# Altium PCB CAN-to-CAN.PcbDoc (part 1 of 2)
Units mil, origin at the board's own origin, x right, y up, seen from the top; angles counter-clockwise.
Board outline 5998 x 3656 mil, 2 copper layers (Top Layer, Bottom Layer); 112 components, 87 nets, 365 pads, 152 vias.
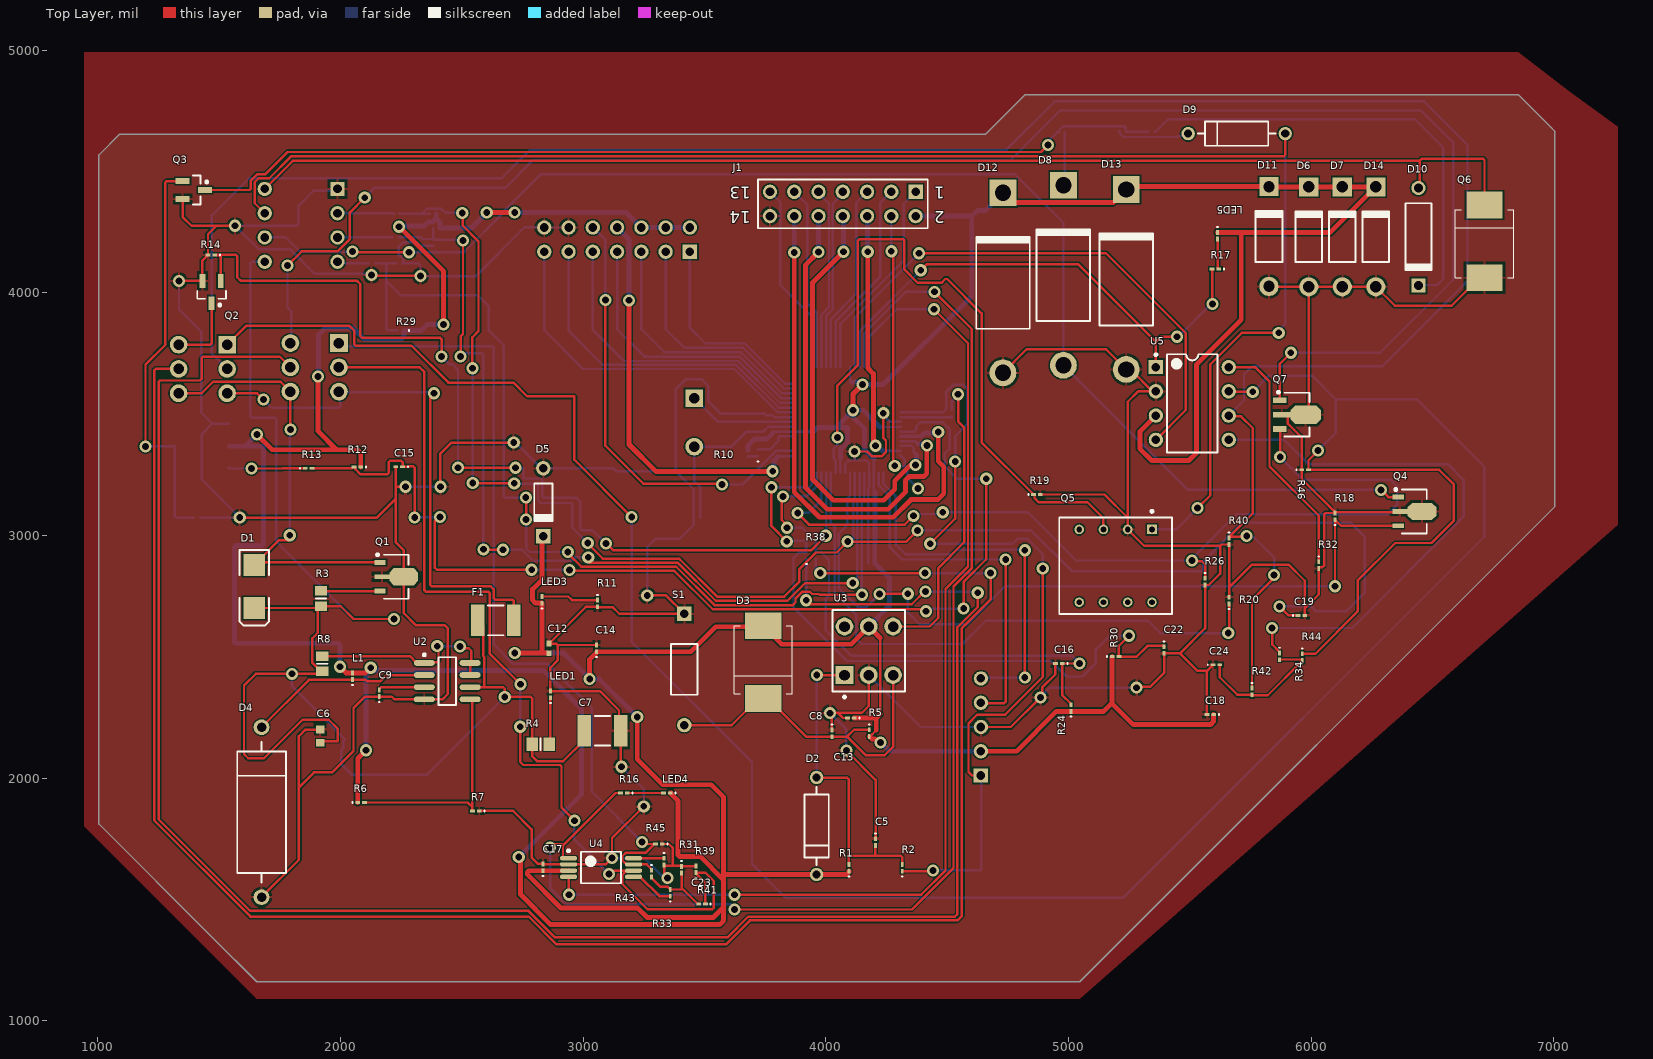
[diagram p0: Top Layer view]
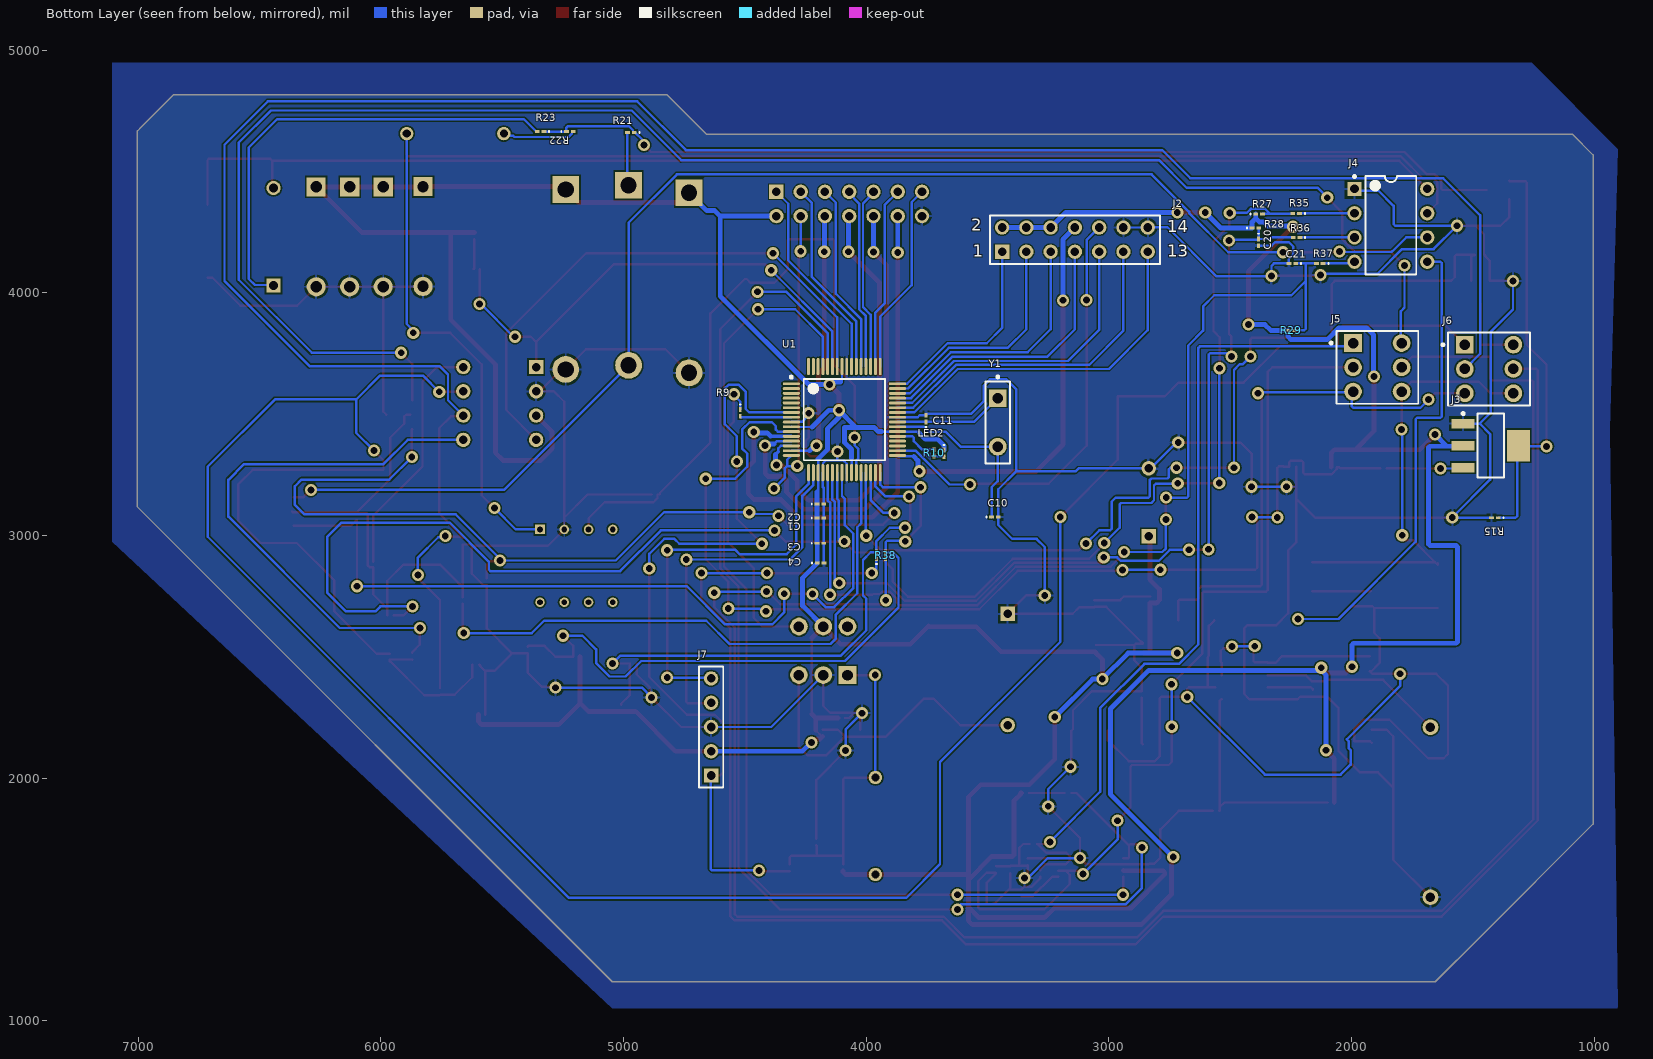
[diagram p1: Bottom Layer view, seen from below]

## Layer stack, top to bottom
Top Solder: solder mask 0.4, Solder Resist, Dk 3.5
Top Layer: signal copper 1.4
Dielectric 1: dielectric 12.6, FR-4, Dk 4.8
Bottom Layer: signal copper 1.4
Bottom Solder: solder mask 0.4, Solder Resist, Dk 3.5

## Board outline
1473,1343 1005,1811 1005,4568 1090,4653 4658,4653 4822,4817 6853,4817 6931,4739 6949,4721 6985,4685 7003,4667 7003,3118 5046,1161 1655,1161

## Design rules (kind name [scope] priority, off if disabled: settings)
Clearance [All] p1: gap=6 ignorepadtopadclearanceinfootprint=FALSE
PolygonConnect [All] p1: connectstyle=Relief reliefconductorwidth=10 reliefentries=4 polygonreliefangle="90 Angle" airgapwidth=10
RoutingVias [All] p1: holewidth=28 width=50 viastyle="Through Hole" minholewidth=28 minwidth=50 maxholewidth=28 maxwidth=50
SolderMaskExpansion [All] p1: expansion=4
Width [All] p1: maxlimit=20 minlimit=5 preferedwidth=10
30 further rules are at their usual default settings.

## Components (designator, comment, footprint, x,y, rotation, side; value= is the part's Value field where it differs from the comment)
C1 "100n" 0603#1 4189,3072 r180 bottom
C2 "100n" 0603#1 4189,3130 r180 bottom
C3 "100n" 0603#1 4189,2968 r180 bottom
C4 "100n" 0603#1 4188,2886 r180 bottom
C5 "100n" 0603#1 4205,1737 r270 top
C6 "10u/16" 1608[0603] 1917,2173 r90 top value=470u/16
C7 "100n" 1812 3080,2195 r0 top
C8 "10n" 0603#1 4025,2185 r270 top value=100pF
C9 "100p" 0603#1 2160,2350 r90 top value=100pF
C10 "27p" 0603#1 3469.38,3076 r180 bottom value=100n
C11 "27p" 0603#1 3753,3482 r90 bottom value=100n
C12 "100u/6V3" 0402 2860,2535 r90 top value=470u/16
C13 "100n" 0603#1 4103,2248 r180 top
C14 "100n" 0603#1 3055,2535 r90 top
C15 "100n" 0603#1 2242.22,3283 r180 top
C16 "100n" 0603#1 4960,2472 r180 top
C17 "100n" 0603#1 2835,1632.22 r90 top
C18 "100n" 0603#1 5584.22,2262 r180 top
C19 "100n" 0603#1 5959.78,2671 r0 top
C20 "100n" 0603#1 2383,4208 r270 bottom
C21 "100n" 0603#1 2244,4121 r0 bottom
C22 "100n" 0603#1 5394,2528.22 r270 top
C23 "4n7" 0603#1 3406,1622.78 r270 top value=100n
C24 "4n7" 0603#1 5609.22,2467.22 r0 top value=100n
D1 "P6SMB15A" SMB 1645,2790 r270 top
D2 "LL4148" DIODE-0.4 3962,1803 r270 top
D3 "LL4448" DIODE_SMC 3742,2478 r90 top
D4 "LL5817" DIODE-0.7 1675,1860 r90 top
D5 "BAT54S" DO-35 2836,3137 r270 top
D6 "BAT54S" DO-41 5989.95,4230.72 r90 top
D7 "BAT54S" DO-204AL 6128.06,4230.72 r90 top
D8 "LL4148" DO-201AD 4979,4072 r90 top
D9 "LL4148" DIODE-0.4 5693,4656 r180 top
D10 "LL4148" DO-7 6442,4231 r270 top
D11 "BAT54S" DO-41 5826,4232 r90 top
D12 "BAT54S" DO-201AD 4730,4041 r90 top
D13 "BAT54S" DO-201AD 5238,4055 r90 top
D14 "BAT54S" DO-41 6266.17,4230.72 r90 top
F1 "Fuse 1" 1812 2640,2650 r180 top
J1 "Header 7X2" HDR2X7 4370,4416 r180 top
J2 "Header 7X2" HDR2X7 3440,4169 r180 bottom
J3 "MX-43045-0400" SOT223_N 1426.42,3370.52 r180 bottom
J4 "MX-43045-0800" DIP-8 1838,4278 r180 bottom
J5 "MX-43045-0600" DPDT-6 1894,3693 r180 bottom
J6 "MX-43045-0600" DPDT-6 1433.44,3686.19 r180 bottom
J7 "ZL201" HDR1X5 4639,2011 r90 bottom
L1 "DL22-330" 0603#1 2050,2420 r90 top value=100uH
LED1 "HCL-1904AYL" 0603#1 2865,2345 r90 top
LED2 "HCL-1906BR1" 0603#1 3679,3338 r270 bottom
LED3 "HCL-1903BG4" 0603#1 2830,2735 r90 top
LED4 "HCL-1904AYL" 0603#1 3345,1939 r180 top
LED5 "HCL-1906BR1" 0603#1 5614,4235 r270 top
Q1 "BSS138" SOT89L 2230,2830 r0 top
Q2 "BSS123" SOT23_M 1469,4003 r270 top
Q3 "BSS123" SOT23_M 1396.26,4423.6 r0 top
Q4 "BSS123" SOT89L 6424.93,3099.06 r0 top
Q5 "BSS123" DIP-P8 5194,2875 r180 top
Q6 "BSS123" DIODE_SMC 6714,4212 r270 top
Q7 "BSS123" SOT89N 5941.6,3497.67 r0 top
R1 "4k7" 0603#1 4095,1630.78 r90 top value=1K
R2 "4k7" 0603#1 4315,1630.78 r90 top value=1K
R3 "1M" 6-0805_L 1920,2740 r90 top value=1K
R4 "4k7" 6-0805_N 2825,2140 r0 top value=1K
R5 "10k" 0603#1 4179,2186 r270 top value=1K
R6 "3k6 1%" 0603#1 2085,1900 r0 top value=1K
R7 "1k2 1%" 0603#1 2558.22,1865 r180 top value=1K
R8 "1R" 6-0805_L 1925,2471.5 r270 top value=1K
R9 "nc" 0603#1 4519,3505 r270 bottom value=1K
R10 "1k8" 0603#2 3720,3341 r90 top value=1K
R11 "1k8" 0603#1 3060,2720 r270 top value=1K
R12 "10k" 0603#1 2070,3282 r180 top value=1K
R13 "470" 0603#1 1868.78,3277 r0 top value=1K
R14 "4k7" 0603#1 1468.22,4156 r180 top value=1K
R15 "4k7" 0603#1 1409.78,3073 r0 bottom value=1K
R16 "4k7" 0603#1 3168.22,1939 r180 top value=1K
R17 "4k7" 0603#1 5605,4098 r180 top value=1K
R18 "4k7" 0603#1 6098,3079 r90 top value=1K
R19 "4k7" 0603#1 4869.78,3169 r0 top value=1K
R20 "4k7" 0603#1 5662,2732 r90 top value=1K
R21 "10k" 0603#1 4969.84,4661 r0 bottom value=1K
R22 "10k" 0603#1 5221.16,4665 r180 bottom value=1K
R23 "10k" 0603#1 5341.78,4664 r0 bottom value=1K
R24 "10k" 0603#1 5010,2289 r90 top value=1K
R25 "1k" 0603#1 3958,2918 r90 bottom value=1K
R26 "4k7" 0603#1 5563,2809.78 r270 top value=1K
R27 "10k" 0603#1 2381,4325 r180 bottom value=1K
R28 "10k" 0603#1 2396.22,4267 r180 bottom value=1K
R29 "10k" 0603#2 2248,3845 r180 top value=1K
R30 "10k" 0603#1 5193.78,2501 r0 top value=1K
R31 "1k" 0603#1 3334,1656 r270 top value=1K
R32 "1k" 0603#1 6031,2878.22 r270 top value=1K
R33 "nc" 0603#1 3358.91,1527.72 r90 top value=1K
R34 "nc" 0603#1 5870,2502.22 r270 top value=1K
R35 "1k" 0603#1 2228.22,4327 r0 bottom value=1K
R36 "1k" 0603#1 2226.78,4228 r0 bottom value=1K
R37 "1k" 0603#1 2131,4121 r0 bottom value=1K
R38 "1k" 0603#2 3920,2918 r90 top value=1K
R39 "CAN0001" 0603#1 3465,1624.78 r90 top
R40 "CAN0001" 0603#1 5662,2976.22 r270 top
R41 "68" 0603#1 3490,1482 r180 top value=1K
R42 "68" 0603#1 5756,2357.44 r270 top value=1K
R43 "68" 0603#1 3282,1607 r270 top value=1K
R44 "68" 0603#1 5963,2499.22 r270 top value=1K
R45 "CAN0001" 0603#1 3312,1729 r180 top
R46 "CAN0001" 0603#1 5975,3271 r0 top
S1 "DTSM32NB" PIN-W2/E2.8 3417,2448 r270 top
U1 "PIC30F5011" ST-64-2_N 4089.85,3477.42 r180 bottom
U2 "MC33063AD" SO8_N 2440,2400 r0 top
U3 "MCP1320-46LT" DPDT-6 4177,2525 r90 top
U4 "MCP2551-I/SN" DB008_L 3074,1632 r0 top
U5 "MCP2551-I/SN" DIP-8 5510,3544 r0 top
Y1 "10MHz" SPST-2 3458,3466 r270 bottom

## Footprints (in the part's own frame and the unit in brackets; to place one, negate y for a bottom-side part, rotate by r counter-clockwise, add the part's x,y. Pads: shape width x height; smd on the part's side, far side on the other; paste and mask are expansions set on the pad)
6-0805_L [mm] "Chip Resistor, Body 2.0x1.2mm, IPC High Density"
  rect 1x1.3 smd: 1(-0.8,0) 2(0.8,0)
  silkscreen extent 0,-0.55 0,0.55, body extent -1.07,-0.7 1.07,0.7, height 0.7
6-0805_N [mm] "Chip Resistor, Body 2.0x1.2mm, IPC Medium Density"
  rect 1.2x1.4 smd: 1(-0.9,0) 2(0.9,0)
  silkscreen extent 0,-0.6 0,0.6, body extent -1.07,-0.7 1.07,0.7, height 0.7
0402 [mm] "Chip Capacitor, Body 1.0x0.5mm, IPC High Density"
  rect 0.6x0.5 smd: 1(-0.5,0) 2(0.5,0)
  body extent -0.55,-0.3 0.55,0.3, height 1.3
0603#1 [mm] "Chip Inductor, Body 0.6x0.3mm, IPC High Density"
  rect 0.5x0.3 smd: 1(-0.35,0) 2(0.35,0)
  silkscreen extent -0.9,-0.05 -0.9,0.05, body extent -0.33,-0.18 0.33,0.18, height 0.55
0603#2 [mm] "Chip Inductor, Body 0.6x0.3mm, IPC High Density"
  rect 0.5x0.3 smd far side: 1(-0.35,0) 2(0.35,0)
  silkscreen extent -0.9,-0.05 -0.9,0.05, body extent -0.33,-0.18 0.33,0.18, height 0.55
1608[0603] [mm] "Chip Capacitor, Body 1.6x0.8mm, IPC High Density"
  rect 0.8x0.9 smd: 1(-0.7,0) 2(0.7,0)
  body extent -0.87,-0.48 0.87,0.48, height 1.3
1812 [mm] "Chip Capacitor, Body 4.5x3.2mm, IPC High Density"
  rect 1.4x3.3 smd: 1(-1.9,0) 2(1.9,0)
  silkscreen extent -0.8,-1.55 0.8,1.55, body extent -2.4,-1.7 2.4,1.7, height 1.4
DB008_L [mm] "SOP, 8-Leads, Body 3x5.3mm, Pitch 0.65mm, IPC High Density"
  oval 1.8x0.45 smd: 1(-3.4,0.975) 2(-3.4,0.325) 3(-3.4,-0.325) 4(-3.4,-0.975) 5(3.4,-0.975) 6(3.4,-0.325) 7(3.4,0.325) 8(3.4,0.975)
  silkscreen extent -3.52,-1.65 2.1,1.87, body extent -2.8,-1.65 2.8,1.65, height 2
DIODE-0.4 [mm] "Diode, Thru-Hole; 2 Leads; 0.4 in Pin Spacing"
  round 1.4 hole 0.85: 1(-5.08,0) 2(5.08,0)
  silkscreen extent -4.06,-1.27 4.06,1.27
DIODE-0.7 [mm] "Diode, Thru-Hole; 2 Leads; 0.7 in Pin Spacing"
  round 1.65 hole 1: 1(-8.89,0) 2(8.89,0)
  silkscreen extent -7.37,-2.54 7.37,2.54
DIODE_SMC [mil] "Diode; 2 Leads"
  rect 110x150 smd: 1(-150,0) 2(150,0)
  silkscreen extent -130,-120 150,120
DIP-8 [mm] "DIP; 8 Leads; Row Spacing 7.62 mm; Pitch 2.54 mm"
  rect 1.5x1.5 hole 0.9: 1(-3.81,3.81)
  round 1.5 hole 0.9: 2(-3.81,1.27) 3(-3.81,-1.27) 4(-3.81,-3.81) 5(3.81,-3.81) 6(3.81,-1.27) 7(3.81,1.27) 8(3.81,3.81)
  silkscreen extent -3.94,-5.15 2.65,5.23, body extent -3.6,-5.15 3.6,5.15, height 5.08
DIP-P8 [mm] "Dual-Pole Dual-Throw Relay; 8 Leads"
  rect 1x1 hole 0.6: 1(-3.81,-3.81)
  round 1 hole 0.6: 2(-1.27,-3.81) 3(1.27,-3.81) 4(3.81,-3.81) 5(3.81,3.81) 6(1.27,3.81) 7(-1.27,3.81) 8(-3.81,3.81)
  silkscreen extent -5.9,-5.82 5.9,5.05
DO-7 [mm] "Diode, Axial; Body 7 x 2.7 mm (LxDia. max), Lead Dia. 0.53 mm (max)"
  round 1.5 hole 0.9: 1(-5.1,0)
  rect 1.5x1.5 hole 0.9: 2(5.1,0)
  silkscreen extent -3.5,-1.35 3.6,1.35
DO-35 [mm] "Diode, Axial; Body 3.8 x 1.9 mm (LxDia. max), Lead Dia. 0.53 mm (max)"
  round 1.5 hole 0.9: 1(-3.55,0)
  rect 1.5x1.5 hole 0.9: 2(3.55,0)
  silkscreen extent -1.95,-0.95 2.05,0.95
DO-41 [mm] "Diode, Axial; Body 5.2 x 2.7 mm (LxDia. max), Lead Dia. 0.86 mm (max)"
  round 2 hole 1.2: 1(-5.23,0)
  rect 2x2 hole 1.2: 2(5.23,0)
  silkscreen extent -2.65,-1.4 2.75,1.4
DO-201AD [mm] "Diode, Axial; Body 9.5 x 5.6 mm (LxDia. max), Lead Dia. 1.32 mm (max)"
  round 2.8 hole 1.7: 1(-9.42,0)
  rect 2.8x2.8 hole 1.7: 2(9.42,0)
  silkscreen extent -4.8,-2.8 4.9,2.8
DO-204AL [mm] "Diode, Axial; Body 5.2 x 2.7 mm (LxDia. max), Lead Dia. 0.86 mm (max)"
  round 2 hole 1.2: 1(-5.23,0)
  rect 2x2 hole 1.2: 2(5.23,0)
  silkscreen extent -2.65,-1.4 2.75,1.4
DPDT-6 [mm] "Switch; 6 Leads"
  rect 1.85x1.85 hole 1.1: 1(-2.54,2.54)
  round 1.85 hole 1.1: 2(-2.54,0) 3(-2.54,-2.54) 4(2.54,-2.54) 5(2.54,0) 6(2.54,2.54)
  silkscreen extent -4.96,-3.81 4.28,3.81
HDR1X5 [mm] "Connector; Header; 5 Position"
  rect 1.5x1.5 hole 0.9: 1(0,0)
  round 1.5 hole 0.9: 2(2.54,0) 3(5.08,0) 4(7.62,0) 5(10.16,0)
  silkscreen extent -1.27,-1.27 11.43,1.27
HDR2X7 [mm] "Connector; Header; 7x2 Position"
  rect 1.5x1.5 hole 0.9: 1(0,0)
  round 1.5 hole 0.9: 2(0,2.54) 3(2.54,0) 4(2.54,2.54) 5(5.08,0) 6(5.08,2.54) 7(7.62,0) 8(7.62,2.54) 9(10.16,0) 10(10.16,2.54) 11(12.7,0) 12(12.7,2.54) 13(15.24,0) 14(15.24,2.54)
  silkscreen extent -1.27,-1.27 16.51,3.81
PIN-W2/E2.8 [mm] "Thru-Hole; 2 Leads"
  rect 1.5x1.5 hole 0.9: 1(-5.825,0)
  round 1.5 hole 0.9: 2(5.825,0)
  silkscreen extent -2.65,-1.4 2.65,1.4
SMB [mm] "DO-214-AA/SMB; 2 C-Bend Leads; Body 5.3 x 3.6 mm, inc. leads (LxW)"
  rect 2.3x2.3 smd: 1(-2.25,0) 2(2.25,0)
  silkscreen extent -3.8,-1.55 4.1,1.55
SO8_N [mm] "SOIC, 8-Leads, Body 4.9x3.9mm, Pitch 1.27mm, IPC Medium Density"
  oval 2.2x0.6 smd: 1(-2.4,1.905) 2(-2.4,0.635) 3(-2.4,-0.635) 4(-2.4,-1.905) 5(2.4,-1.905) 6(2.4,-0.635) 7(2.4,0.635) 8(2.4,1.905)
  silkscreen extent -2.52,-2.5 0.9,2.88, body extent -2,-2.5 2,2.5, height 1.75
SOT23_M [mm] "SOT23, 3-Leads, Body 2.9x1.3mm, Pitch 0.95mm, Lead Span 2.3mm - Reverse Pinning, IPC Low Density"
  rect 1.45x0.6 smd: 1(1.175,0) 2(-1.175,-0.95) 3(-1.175,0.95)
  silkscreen extent -0.1,-1.5 1.47,1.5, body extent -0.7,-1.5 0.7,1.5, height 1.1
SOT89L [mm] "SOT89, 3-Leads, Body 4.5x2.4 mm, Pitch 1.5mm, Lead Span 4.1mm, IPC High Density"
  rect 1.2x0.5 smd: 1(-1.7,1.5) 3(-1.7,-1.5)
  rect 1.6x0.5 smd: 2(-1.5,0)
  oct 3x1.8 smd: 2(0.8,0)
  silkscreen extent -2.07,-2.3 1.3,2.42, body extent -1.3,-2.3 1.3,2.3, height 1.6
SOT89N [mm] "SOT89, 3-Leads, Body 4.5x2.4 mm, Pitch 1.5mm, Lead Span 4.1mm, IPC Medium Density"
  rect 1.4x0.6 smd: 1(-1.8,1.5) 3(-1.8,-1.5)
  rect 1.8x0.6 smd: 2(-1.6,0)
  oct 3.2x1.9 smd: 2(0.9,0)
  silkscreen extent -2.07,-2.3 1.3,2.47, body extent -1.3,-2.3 1.3,2.3, height 1.6
SOT223_N [mm] "SOT223, 4-Leads, Body 6.5x3.5mm, Pitch 2.3mm, Lead Span 7mm, IPC Medium Density"
  rect 2.4x1 smd: 1(-2.9,2.3) 2(-2.9,0) 3(-2.9,-2.3)
  rect 2.4x3.3 smd: 4(2.9,0)
  silkscreen extent -3.03,-3.35 1.4,3.47, body extent -1.85,-3.35 1.85,3.35, height 1.7
SPST-2 [mm] "Switch; 2 Leads"
  rect 1.85x1.85 hole 1.1: 1(-2.54,0)
  round 1.85 hole 1.1: 2(2.54,0)
  silkscreen extent -4.89,-1.27 4.28,1.27
ST-64-2_N [mm] "Thin QFP, 64-Leads, Body 10x10mm, Pitch 0.5mm, IPC Medium Density"
  oval 1.8x0.3 smd: 1(-5.55,3.75) 2(-5.55,3.25) 3(-5.55,2.75) 4(-5.55,2.25) 5(-5.55,1.75) 6(-5.55,1.25) 7(-5.55,0.75) 8(-5.55,0.25) 9(-5.55,-0.25) 10(-5.55,-0.75) 11(-5.55,-1.25) 12(-5.55,-1.75) 13(-5.55,-2.25) 14(-5.55,-2.75) 15(-5.55,-3.25) 16(-5.55,-3.75) 33(5.55,-3.75) 34(5.55,-3.25) 35(5.55,-2.75) 36(5.55,-2.25) 37(5.55,-1.75) 38(5.55,-1.25) 39(5.55,-0.75) 40(5.55,-0.25) 41(5.55,0.25) 42(5.55,0.75) 43(5.55,1.25) 44(5.55,1.75) 45(5.55,2.25) 46(5.55,2.75) 47(5.55,3.25) 48(5.55,3.75)
  oval 0.3x1.8 smd: 17(-3.75,-5.55) 18(-3.25,-5.55) 19(-2.75,-5.55) 20(-2.25,-5.55) 21(-1.75,-5.55) 22(-1.25,-5.55) 23(-0.75,-5.55) 24(-0.25,-5.55) 25(0.25,-5.55) 26(0.75,-5.55) 27(1.25,-5.55) 28(1.75,-5.55) 29(2.25,-5.55) 30(2.75,-5.55) 31(3.25,-5.55) 32(3.75,-5.55) 49(3.75,5.55) 50(3.25,5.55) 51(2.75,5.55) 52(2.25,5.55) 53(1.75,5.55) 54(1.25,5.55) 55(0.75,5.55) 56(0.25,5.55) 57(-0.25,5.55) 58(-0.75,5.55) 59(-1.25,5.55) 60(-1.75,5.55) 61(-2.25,5.55) 62(-2.75,5.55) 63(-3.25,5.55) 64(-3.75,5.55)
  silkscreen extent -5.68,-4.25 4.25,4.57, body extent -5,-5 5,5, height 1.6

## Part data
C1 C2 C3 C4 C5 C7 C8 C9 C10 C11 C13 C14 C15 C16 C17 C18 C19 C20 C21 C22 C23 C24: library part Cap, "Capacitor", LatestRevisionDate=17-Jul-2002, LatestRevisionNote="Re-released for DXP Platform.", PackageReference=RAD-0.3, Published=8-Jun-2000, Publisher="Altium Limited"
C6 C12: library part "Cap Pol1", "Polarized Capacitor (Radial)", LatestRevisionDate=17-Jul-2002, LatestRevisionNote="Re-released for DXP Platform.", PackageReference=RB7.6-15, Published=8-Jun-2000, Publisher="Altium Limited"
D1: library part "D Zener", "Zener Diode", LatestRevisionDate=17-Jul-2002, LatestRevisionNote="Re-released for DXP Platform.", PackageReference=DIODE-0.7, Published=8-Jun-2000, Publisher="Altium Limited"
D2 D4 D8 D9 D10: library part 1N4148, "High Conductance Fast Diode", Code_JEDEC=DO-204-AH, ComponentLink1Description="Manufacturer Link", ComponentLink1URL=http://www.fairchildsemi.com/, ComponentLink2Description=Datasheet, ComponentLink2URL=http://www.fairchildsemi.com/ds/1N%2F1N4148.pdf, DatasheetDocument=1997, LatestRevisionDate=17-Jul-2002, LatestRevisionNote="Re-released for DXP Platform.", PackageReference=DO-35, Published=8-Jun-2000, Publisher="Altium Limited"
D3: library part Diode, "Default Diode", PackageDocument=Sep-1996, Code_JEDEC=DO-214-AB, LatestRevisionDate=17-Jul-2002, LatestRevisionNote="Re-released for DXP Platform.", PackageReference=SMC, Published=8-Jun-2000, Publisher="Altium Limited"
D5 D6 D7 D11 D12 D13 D14: "Schottky Barrier Double Diode", ComponentLink1Description="Manufacturer Link", ComponentLink1URL=http://www.semiconductors.philips.com/, ComponentLink2Description=Datasheet, ComponentLink2URL=http://www.semiconductors.philips.com/acrobat/datasheets/BAT54_SERIES_4.pdf, DatasheetVersion=4-Mar-2002, LatestRevisionDate=12-Dec-2006, LatestRevisionNote="IPC-7351 Footprint Added.", PackageDescription="3-Pin SOT-23 Package 0.95 mm Pitch, 2.3 mm Lead Span", PackageReference=SOT23, PackageVersion=May-1999, Published=17-Sep-2003, Publisher="Altium Limited"
F1: "Fuse", LatestRevisionDate=17-Jul-2002, LatestRevisionNote="Re-released for DXP Platform.", PackageReference=PIN-W2/E2.8, Published=8-Jun-2000, Publisher="Altium Limited"
J1 J2: "Header, 7-Pin, Dual row", LatestRevisionDate=17-Jul-2002, LatestRevisionNote="Re-released for DXP Platform.", Publisher="Altium Limited"
J3: library part "Header 2X2", "Header, 2-Pin, Dual row", LatestRevisionDate=17-Jul-2002, LatestRevisionNote="Re-released for DXP Platform.", Publisher="Altium Limited"
J4: library part "Header 4X2A", "Header, 4-Pin, Dual row", LatestRevisionDate=17-Jul-2002, LatestRevisionNote="Re-released for DXP Platform.", Publisher="Altium Limited"
J5 J6: library part "Header 6", "Header, 6-Pin", LatestRevisionDate=17-Jul-2002, LatestRevisionNote="Re-released for DXP Platform.", Publisher="Altium Limited"
J7: library part CON5, "Connector"
L1: library part "Inductor Iron", "Magnetic-Core Inductor", Published=24-Mar-1999, Publisher="Altium Limited", Revision="July-2002: Re-released for DXP Platform."
LED1 LED2 LED3 LED4 LED5: library part LED3, "Typical BLUE SiC LED", Published=8-Jun-2000, Publisher="Altium Limited", Revision 1="Jul-2002: Re-released for DXP Platform.", Revision 2="17-Dec-2003: PCB Footprint replaced."
Q1: "N-Channel Enhancement Mode Vertical DMOS FET", ComponentLink1Description="Manufacturer Link", ComponentLink1URL=http://www.zetex.com/, ComponentLink2Description=Datasheet, ComponentLink2URL=www.zetex.com/3.0/pdf/BSS138.pdf, DatasheetVersion=Mar-96, PackageDescription="SOT-23; 3 Leads; Body 3.1 x 2.5 mm, inc. leads (LxW max), Alternate Lead Configuration", PackageReference=SOT23, PackageVersion=1996, Published=17-Dec-2003, Publisher="Altium Limited"
Q2 Q3 Q4 Q5 Q6 Q7: "N-channel Enhancement Mode Vertical D-MOSFET", ComponentLink1Description="Manufacturer Link", ComponentLink1URL=http://www.semiconductors.philips.com/, ComponentLink2Description=Datasheet, ComponentLink2URL=http://www.semiconductors.philips.com/acrobat/datasheets/BSS123_3.pdf, DatasheetVersion=Apr-1995, LatestRevisionDate=12-Dec-2006, LatestRevisionNote="IPC-7351 Footprint Added.", PackageDescription="3-Pin SOT-23 Package 0.95 mm Pitch, 2.3 mm Lead Span", PackageReference=SOT23, PackageVersion=May-1999, Published=17-Sep-2003, Publisher="Altium Limited"
R1 R2 R3 R4 R5 R6 R7 R8 R9 R10 R11 R12 R13 R14 R15 R16 R17 R18 R19 R20 R21 R22 R23 R24 R25 R26 R27 R28 R29 R30 R31 R32 R33 R34 R35 R36 R37 R38 R41 R42 R43 R44: library part Res2, "Resistor", LatestRevisionDate=17-Jul-2002, LatestRevisionNote="Re-released for DXP Platform.", PackageReference=AXIAL-0.4, Published=8-Jun-2000, Publisher="Altium Limited"
R39 R40 R45 R46: library part "Res Varistor", "Varistor (Voltage-Sensitive Resistor)", LatestRevisionDate=04-Mar-2005, LatestRevisionNote="PCB Footprint replaced.", PackageReference=6-0805, Published=24-Mar-1999, Publisher="Altium Limited"
S1: library part PUSHB, "Switch PushButton"
U1: "PIC30F5011 - Up"
U2: "DC-to-DC Converter Control Circuit", Code_IPC=SOIC127P600-8, Code_JEDEC=MS-012-AA, ComponentLink1Description="Manufacturer Link", ComponentLink1URL=http://www.onsemi.com/site/products/taxonomy/0,4438,503,00.html, ComponentLink2Description=Datasheet, ComponentLink2URL=http://www.onsemi.com/pub/Collateral/MC34063A-D.PDF, DatasheetVersion=1988, LatestRevisionDate=13-Apr-2006, LatestRevisionNote="IPC-7351 Footprint Added.", PackageDescription="8-Pin Small Outline Integrated Circuit 1.27 mm Pitch", PackageReference=751-02, Published=17-Jul-2002, Publisher="Altium Limited"
U3: library part MCP1320
U4 U5: "High Speed CAN Transceiver, 8-Pin Plastic SOIC, Industrial Grade", Code_JEDEC=MS-012, ComponentLink1Description="Manufacturer Link", ComponentLink1URL=http://www.microchip.com, ComponentLink2Description=Datasheet, ComponentLink2URL=http://ww1.microchip.com/downloads/en/DeviceDoc/21667d.pdf, DatasheetVersion=Nov-2003, LatestRevisionDate=13-Apr-2006, LatestRevisionNote="IPC-7351 Footprint Added.", PackageDescription="8-Pin Plastic Narrow Body Small Outline Integrated Circuit 1.27 mm Pitch", PackageReference=SOIC150-8, PackageVersion=Oct-2005, Published=6-Oct-2005, Publisher="Altium Limited"
Y1: library part XTAL, "Crystal Oscillator", LatestRevisionDate=17-Jul-2002, LatestRevisionNote="Re-released for DXP Platform.", PackageReference=R38, Published=8-Jun-2000, Publisher="Altium Limited"

## Via types
v1: diameter 50, hole 28, Top Layer to Bottom Layer, 152 vias

## Nets (pads, with @x,y where several pads share a name; then routed paths per layer and width w, separated by ;. In a path a pad name is that pad's centre, name@x,y a point inside that pad or via, vN(x,y) a via of type N, cw(c..) or ccw(c..) an arc to the next point about the centre after c; other vN are vias at no path point)
+5V: C1.1 C2.1 C3.1 C4.1 C12.1 C13.1 C14.1 C17.1 C18.1 D2.2 D3.2 D5.2 D6.2 D7.2 D11.2 D12.2 D13.2 D14.2 J1.2 J2.2 J2.4 J2.6 J3.2 J7.2 L1.2 LED2.1 LED3.1 LED4.1 LED5.1 R1.1 R5.2 R6.1 R12.1 R24.1 R27.1 R28.1 R29.1 R30.1 U1.10 U1.19 U1.26 U1.38 U1.57 U3.5 U4.3 U5.3 | length 23948.2
  Top Layer w10: R5.2 4182.74,2172.22 4208,2197.48 ; 4224.42,2264.42 4224.42,2577.58
  Top Layer w20: v1(1656,3416) 1718.71,3353.29 1984,3353.29 ; v1(1908,3655) 1908,3429.29 1984,3353.29 ; v1(1998,2459) 2023.22,2433.78 L1.2 2103.78,2433.78 v1(2125,2455) ; R6.1 2071.22,2081.22 v1(2105,2115) ; R12.1 2084,3282.22 2084,3340 2070.71,3353.29 1984,3353.29 ; v1(2242,4272) 2425,4089 v1(2425,3869) ; v1(2603,4331) v1(2718,4331) ; v1(2718.32,2515.32) 2833,2515.32 ; v1(2735,1675) 2742,1668 2742,1522 2867,1397 3563.14,1397 3579,1412.86 3579,1601 ; D5.2 2831,2992.24 2831,2818 2792,2779 2792,2732.94 2803.72,2721.22 LED3.1 2830,2518.32 2833,2515.32 ; C12.1@2855.16,2515.32 2833,2515.32 ; U4.3 2939.76,1618.82 2835.38,1618.82 C17.1 2775.56,1618.44 2769.7,1612.58 2769.7,1604.3 2909,1465 3225,1465 3264,1426 3536,1426 3578,1468 ; v1(3027,2409) 3027,2489.28 3055,2517.28 C14.1 3444.22,2521.22 3547,2624 3738,2624 D3.2 3818,2552 4104,2552 U3.5 4224.42,2577.58 ; v1(3223,2252) 3223,2078.52 3328.52,1973 3528,1973 3579,1922 3579,1601 ; LED4.1 3362.72,1939 3363.62,1938.09 3363.62,1934.16 3391,1906.78 3391,1683.86 3396.86,1678 3482,1678 3578,1582 ; R1.1 4095,1613.06 4084.94,1603 D2.2 3581,1603 3579,1601 ; v1(4112,3516) 4112,3583 v1(4151,3622) ; C13.1 4208,2248 ; R5.2 4189.25,2161.97 4201.91,2161.97 4216.88,2147 v1(4225,2147) ; 4208,2197.48 4208,2248 ; 4224.42,2264.42 4208,2248 ; J7.2 4786,2111 4950.22,2275.22 R24.1 5145.22,2275.22 5179,2309 ; D12.2 4770.12,4371.75 5183.88,4371.75 D13.2 5250.04,4437.91 D11.2 5827.28,4436.63 D6.2 D7.2 D14.2 6078.32,4248.78 5712,4248.78 ; R30.1 5179,2500 5179,2309 ; U5.3 5294,3428 5294,3358 5343,3309 5496,3309 5528,3341 5528,3705 5712,3889 5712,4248.78 ; C18.1 5598,2234 5585,2221 5267,2221 5179,2309 ; LED5.1 5712,4248.78
  Bottom Layer w10: 3781,3422 3787.2,3428.2 U1.38 3936.8,3428.2 ; U1.26 4060.32,3318 ; U1.57 4099.69,3638.86 4105.55,3633 ; 4198.12,3315.88 U1.19 4198.12,3184.88 4202.78,3180.22 ; 4223,3447 4307.46,3447 U1.10
  Bottom Layer w20: J3.2@1543.11,3368 1677.14,3368 1683,3362.14 1683,2964.86 1677.14,2959 1569.86,2959 1564,2953.14 1564,2561.86 1569.86,2556 1992.14,2556 1998,2550.14 v1(1998,2459) ; 1610.52,3370.52 v1(1656,3416) ; v1(1908,3655) 1909,3656 1909,3826 1938,3855 2052,3855 2100,3807 2250.06,3807 2261.78,3818.72 R29.1 2333,3845 2357,3869 v1(2425,3869) ; v1(2105,2115) 2105,2424.18 2125,2444.18 v1(2125,2455) 2136,2444 2835,2444 2994,2285 2994,1934 v1(2735,1675) ; v1(2242,4272) 2245,4275 2344.78,4275 2361.78,4292 2380,4292 2394.78,4306.78 ; R27.1 2394.78,4306.78 ; v1(2603,4331) 2539,4267 R28.1 2410,4291.56 2394.78,4306.78 ; v1(2718,4331) 3178,4331 J2.6 J2.4 J2.2 ; v1(2718.32,2515.32) 2920.69,2515.32 v1(3027,2409) 3028,2408 3067,2408 v1(3223,2252) ; D5.2 D5.2@2836.24,2997 ; LED2.1 3679,3370 3706,3397 3756,3397 3781,3422 ; 3936.8,3428.2 3950.2,3428.2 3967,3445 4089,3445 4089,3383 4060.32,3354.32 4060.32,3318 ; 4049,3453 v1(4112,3516) ; 4105.55,3633 4143,3633 v1@4146,3630 ; v1(4151,3622) 4237,3622 4601.29,3986.29 4601.29,4316 ; U3.5 4262,2710 4262,2825.78 C4.1 4201.78,2967 C3.1 C1.1 C2.1 4202.78,3180.22 ; 4198.12,3315.88 4160,3354 4160,3439 4112,3487 v1(4112,3516) ; 4223,3447 4154,3516 v1(4112,3516) ; v1(4225,2147) 4227,2147 4263,2111 J7.2 ; J1.2 4601.29,4316 ; D12.2 4656.6,4338.46 4623.76,4338.46 4601.29,4316
+12V: C6.1 C7.1 D1.2 F1.2 J4.5 R3.1 R4.1 R8.2 U2.6 | length 6428.6
  Top Layer w10: D1.2 R3.1@1907.01,2701.42 ; R3.1@1914.09,2708.5 R3.1@1907.01,2701.42 ; C6.1 1923.9,2152.35 1988.6,2152.35 1988.6,2204.4 1952,2241 1844,2241 1685,2082 1620,2082 1602.6,2099.4 1602.6,2381.6 1651,2430 v1(1800,2430) 1915,2430 R8.2 1919.09,2440 1884.41,2474.69 1884.41,2576.75 1907.01,2599.35 R3.1@1907.01,2701.42 ; R3.1 2001.5,2708.5 2054,2656 v1(2221,2656) ; U2.6@2562.3,2375 2586.94,2375 ; F1.2 2587.76,2627.44 2587.76,2504.49 2592.8,2499.45 2592.8,2380.86 2586.94,2375 ; C7.1 3005.2,2157.6 2918,2070.4 2810.6,2070.4 2789.57,2091.43 R4.1 2789.57,2329.14 2783.71,2335 v1(2677,2335) 2677,2369.14 2671.14,2375 2586.94,2375
  Bottom Layer w10: J4.5 1633.86,4128 1628,4122.14 1628,3490.86 1633.86,3485 1730.14,3485 1736,3479.14 1736,2974 2054,2656 v1(2221,2656) ; v1(1800,2430) 1800,2380 2020,2160 2012.35,2152.35 2012.35,2124.06 2004.14,2115.86 2004.14,2055.86 2045,2015 2357,2015 v1(2677,2335)
+12VPWR: F1.1 J5.3 J6.3 | length 2218.5
  Top Layer w10: J6.3 1656.81,3586.19 v1(1683,3560) ; v1(2386,3586) 2381,3581 2375.86,3581 2370,3575.14 2370,2796.86 2375.86,2791 2619.14,2791 2632,2778.14 2632,2741.86 2637.86,2736 2708.95,2736 2714.8,2730.14 F1.1
  Bottom Layer w10: v1(1683,3560) 1717,3526 1993,3526 1998.86,3531.86 1998.86,3588.14 J5.3@1997.5,3589.5 ; J5.3 J5.3@1997.5,3589.5 ; v1(2386,3586) 2382.5,3589.5 J5.3@1997.5,3589.5
ADC0: J1.4 U1.16 | length 1242.7
  Top Layer w10: v1(4270,4171) 4277,4164 4277,3294 v1(4284,3287)
  Bottom Layer w10: v1(4270,4171) J1.4 ; v1(4284,3287) 4285,3286 4326,3286 ; U1.16 4326,3312.13 4326,3286 ; v1(4380,3194) 4335,3239 4335,3277 4326,3286
ADC1: J1.6 U1.15 | length 1072.4
  Top Layer w20: v1(4173,4169) 4173,3690 4196,3667 4196,3379 v1(4205,3370)
  Bottom Layer w10: 4233.65,3349.46 U1.15
  Bottom Layer w20: J1.6 4171.5,4314.5 4171.5,4170.5 v1(4173,4169) ; v1(4205,3370) 4213.12,3370 4233.65,3349.46
ADC2: J1.8 U1.14 | length 1819.1
  Top Layer w20: v1(4073,4169) 3945,4041 3945,3231 4031,3145 4238,3145 4284,3191 4284,3225 4350.72,3291.72 4367.28,3291.72 v1(4369,3290)
  Bottom Layer w10: U1.14 4351.85,3369.15 4362.28,3358.72 4362.28,3345
  Bottom Layer w15: 4362.28,3345 4374,3333.28
  Bottom Layer w20: J1.8 4064,4310 4073,4301 v1(4073,4169) ; v1(4369,3290) 4374,3295 4374,3333.28
ADC3: J1.10 U1.13 | length 1999.3
  Top Layer w20: v1(3970,4168) 3916,4114 3916,3198 4006,3108 4257,3108 4328,3179 4328,3227 4344,3243 4404.28,3243 4416,3254.72 4416,3370 v1(4417,3371)
  Bottom Layer w10: U1.13 4367.17,3388.83 4379.26,3376.74
  Bottom Layer w20: v1(3970,4168) J1.10 ; 4379.26,3376.74 4411.26,3376.74 v1(4417,3371)
ADC4: J1.12 U1.12 | length 2261.7
  Top Layer w20: v1(3870,4166) 3870,3179 3974,3075 4278,3075 4351,3148 4462,3148 4486,3172 4486,3283.44 4463,3306.44 v1(4463,3426)
  Bottom Layer w14: U1.12 4308.83,3409 4394,3409
  Bottom Layer w20: v1(3870,4166) J1.12 ; 4394,3409 4408,3423 4460,3423 v1(4463,3426)
ButD: C19.1 R27.2 R35.2 U1.23 | length 6774.3
  Top Layer w10: v1(2502,4329) 2504,4327 2504,4277 2569,4212 2569,3842 2544,3817 v1(2544,3689) ; v1@2544,3217 v1(2545,3216) 2546,3215 v1(2716,3215) ; v1@3026,2962 3026,2960 3081,2905 3394.37,2905 3397.37,2902 3398.25,2902 3552.25,2748 3829,2748 3891,2810 3891,2862 3959,2930 4045,2930 v1(4090,2975) 4332,2975 v1(4378,3021) ; v1(5869,2708) 5906,2671 C19.1
  Bottom Layer w10: R35.2 2245.94,4327 2247.94,4325 2335,4325 ; R27.2 2335,4325 ; v1(2502,4329) 2432.09,4329 2415.09,4346 2356,4346 2335,4325 ; v1(2544,3689) 2545,3688 v1(2545,3216) ; v1@2708,3213 2807,3213 2814,3206 2814,3145 2825,3134 2950.14,3134 2956,3128.14 2956,3032 v1(3019,2969) ; v1@4100,2972 4106,2972 4113,2979 4113,3144.34 4119.38,3150.72 U1.23 ; v1(4378,3021) 4846,3021 5014,2853 5548.14,2853 5554,2858.86 5554,2891 5715.86,3052.86 5724.14,3052.86 5725,3052 6164,3052 6220,2996 6220,2763 6144,2687 6022.41,2687 6001.41,2708 v1(5869,2708)
ButD_IN: J4.2 R35.1 | length 234.4
  Bottom Layer w10: J4.2 1988.5,4327.5 2213.94,4327.5 R35.1 2218.38,4327 2220.38,4325 R35.1@2221.16,4325
ButN: C20.1 R28.2 R36.2 U1.22 | length 3797.3
  Top Layer w10: v1(2495,3738) 2495,3820 2505,3830 v1(2505,4215) ; v1(2589,2943) 2590.86,2941.14 v1(2670.14,2941.14) ; v1@3027,2887 3390.63,2887 3546.63,2731 3842,2731 3915,2804 v1(4111,2804)
  Bottom Layer w10: R36.2 2332,4228 2338.22,4221.78 C20.1 ; R28.2 2382.72,4266.72 2382.72,4222.06 C20.1 ; v1(2495,3738) 2493,3740 2493,3752 2494,3751 2583.14,3751 2589,3745.14 v1(2589,2943) ; v1(2505,4215) 2498.22,4215 2494.83,4218.39 2383.91,4218.39 2383,4219.3 C20.1 ; v1(2670.14,2941.14) 2749,2941.14 2749,2940.37 2793.37,2896 2951.91,2896 2965.91,2910 v1(3021,2910) ; v1@4129,2816 4129,3137.71 4139.06,3147.78 U1.22
ButN_IN: J4.3 R36.1 | length 225
  Bottom Layer w10: J4.3 R36.1
ButR: C21.1 R29.2 R37.2 U1.21 | length 4010.6
  Top Layer w10: v1(2764,3156) 2765,3155 v1(2765,3066) ; v1@2940,2924 2993,2871 3384,2871 3543,2712 3862.14,2712 3875,2724.86 3875,2739.91 3904.09,2769 3933.91,2769 3943.91,2759 3971,2759 3974,2756 v1(4149,2756)
  Bottom Layer w10: R37.2 2187.5,4121 ; C21.1 2187.5,4121 ; R29.2 2195.86,3845 2189,3851.86 2189,4048.72 ; v1(2764,3156) 2678.86,3156 2673,3161.86 2673,3783 2612,3844 2612,3944 2566,3990 2247.72,3990 2189,4048.72 ; v1(2765,3066) 2765,2947 2780,2932 v1(2937,2932) ; v1@4148,2746 4147.38,2746.62 4147.38,3133.46 4158.75,3144.83 U1.21 ; 2187.5,4121 2189,4119.5 2189,4048.72
ButR_IN: J4.4 R37.1 | length 133.7
  Top Layer w10: J4.4 J4.4@1989.09,4129.09
  Bottom Layer w10: J4.4 1994.09,4121.91 2116.31,4121.91 R37.1
CAN_BMS_RX: U1.58 U5.4 | length 2302.9
  Top Layer w10: v1(4384,4163) 5153.91,4163 5483,3833.91 5483,3517 U5.4
  Bottom Layer w10: U1.58 4119.38,3898.38 v1(4384,4163)
CAN_BMS_TX: R17.2 U1.59 U5.1 | length 2158.9
  Top Layer w10: v1(4391,4093) 4415,4117 5041,4117 5360,3798 ; U5.1 5360,3798 ; v1(5447,3819) 5381,3819 5360,3798 ; R17.2 5592.11,4097.11 5592.11,3954.89 v1(5593,3954)
  Bottom Layer w10: U1.59 4139.06,3841.06 v1(4391,4093) ; v1(5447,3819) 5452.5,3819 5587.5,3954 v1(5593,3954)
CAN_BMSS_H: J6.1 R44.1 R46.2 U5.7 | length 11098.8
  Top Layer w10: J6.1 1611,3863.75 2037.25,3863.75 2057,3844 2057,3787.86 2062.86,3782 2293,3782 2445,3630 2713,3630 2770,3573 2964,3573 2964,3312 v1(3200,3076) ; U5.7 5661,3593 5758,3593 v1(5759,3592) ; R44.1 6017,2513 6191,2687 6191,2814 6346,2969 6495,2969 6588,3062 6588,3210 6527,3271 R46.2 5988.78,3309.78 6028,3349 v1(6028,3350)
  Bottom Layer w10: v1(3200,3076) 3200,2562 3696,2066 3696,1646 3835,1507 5225,1507 6713,2995 6713,3284 6436,3561 6101,3561 ; v1(5759,3592) 5826,3659 6003,3659 6101,3561 ; v1(6028,3350) 6101,3423 6101,3561
CAN_BMSS_L: J6.2 R40.1 R42.1 U5.6 | length 9351.6
  Top Layer w10: U5.6 5663,3491 5711,3491 5759,3443 5759,3090.94 5662,2993.94 R40.1@5662,2993.09 ; R40.1 R40.1@5662,2993.09 ; v1(5734,2998) 5730,2994 5662.91,2994 R40.1@5662,2993.09 ; R42.1 5756,2734 5847,2825 v1(5847,2837)
  Bottom Layer w10: J6.2 1470,3749.63 1470,4319 1623,4472 2664,4472 2780,4588 4743,4588 4944,4789 6465,4789 6644,4610 6644,4049 6293,3698 5758,3698 5723,3663 5723,3557 U5.6 ; v1(5734,2998) 5739,2993 5763,2993 5847,2909 v1(5847,2837)
CAN_MUX_RX: U1.61 U4.4 | length 4502.7
  Top Layer w10: v1@2940,1529 2940.14,1529.14 U4.4 ; v1(3624,1520) 4392.91,1520 4493.28,1620.37 4493.28,2779.54 4586,2872.25 4586,3792 v1(4446,3932)
  Bottom Layer w10: v1(2942,1520) v1(3624,1520) ; U1.61 4178.43,3818.43 4292,3932 v1(4446,3932)
CAN_MUX_TX: R16.2 U1.60 U4.1 | length 5344.7
  Top Layer w10: v1@2874,1722 2880,1728 2911.14,1728 2917,1722.14 ; U4.1 2920.56,1670.39 2917,1673.95 2917,1722.14 ; R16.2 3133.86,1939 2917,1722.14 ; v1(3624,1459) 4354.54,1459 4526,1630.46 4526,2789.63 4602,2865.63 4602,3850 v1(4448,4004)
  Bottom Layer w10: v1(2864,1714) 2864,1547.09 2930.09,1481 3610,1481 v1@3622,1469 ; U1.60 4159,3696.17 4159,3834 4329,4004 v1(4448,4004)
CAN_MUXED_H: J5.1 R43.1 R45.2 U4.7 | length 3386.9
  Top Layer w10: v1(3243,1737) 3251,1729 R45.2@3294.28,1729 ; R43.1 3282,1624.72 3261.92,1644.8 3179.2,1644.8 3173.46,1650.53 3173.06,1650.53 3161.43,1662.16 3161.43,1678.61 3176.12,1693.31 3258.59,1693.31 R45.2@3294.28,1729 ; R45.2 R45.2@3294.28,1729
  Bottom Layer w10: J5.1 2008,3779 2625.14,3779 2631,3773.14 2631,2551.72 2711.72,2471 2854,2471 3036,2289 3036,1944 v1(3243,1737)
CAN_MUXED_L: J5.2 R39.1 R41.1 U4.6 | length 3919.2
  Top Layer w10: J5.2 2326.14,3693 2346,3673.14 2346,2774.86 2351.86,2769 2609.14,2769 2615,2763.14 2615,2514 v1(2742,2387) ; v1(2741,2212) 2741,2066.8 2753.4,2054.4 2905.14,2054.4 2911,2048.54 2911,1879 v1(2965,1825) v1@2963,1820 ; v1(3107,1605) 3121.2,1619.2 U4.6@3179.2,1619.2 ; U4.6 U4.6@3179.2,1619.2 ; R41.1 3503.78,1568.28 3465,1607.06 R39.1 3503,1611 3538,1576 3538,1465.86 3532.14,1460 3266,1460 3161.43,1564.57 3161.43,1601.84 3173.06,1613.47 3173.46,1613.47 U4.6@3179.2,1619.2
  Bottom Layer w10: v1(2741,2212) 2741,2386 v1(2742,2387) ; v1@2963,1820 2963,1749 v1(3107,1605)
ChrgLED: Q2.3 R14.1 U1.29 | length 3991.8
  Top Layer w10: Q2.3 1506.4,4150.14 1501.45,4155.09 1492.18,4155.09 1493.08,4156 1569.14,4156 1575,4150.14 1575,4064 1590,4049 2069,4049 2082,4036 2082,3822 2090,3814 2411.14,3814 2417,3808.14 v1(2417,3737) ; v1@2484,3280 v1(2484.5,3279.5) 2485,3279 v1(2721,3279) ; v1(3094,2967) 3096.57,2967 3123.57,2940 3941,2940 v1(4000,2999)
  Bottom Layer w10: v1(2417,3737) 2448.08,3705.92 2461.08,3705.92 2484.5,3682.5 v1(2484.5,3279.5) ; v1(2721,3279) 2747.14,3279 2753,3273.14 2753,3240.86 2758.86,3235 2825.14,3235 2831,3229.14 2831,3161.86 2836.86,3156 2972,3156 2988.81,3139.19 2988.81,3027.67 2994.67,3021.81 3039.19,3021.81 v1(3094,2967) ; v1(4000,2999) 4000.92,2999.92 4000.92,3258.57 U1.29
ChrgLED_OUT: J6.6 Q2.1 | length 304.1
  Top Layer w10: J6.6 1464.14,3786.19 1470,3792.05 1470,3955.74 Q2.1
FluidHeater: Q7.3 R26.1 U1.30 | length 3769.7
  Top Layer w10: v1(3884,3093) 3887,3090 3887,3088 3930,3045 4325,3045 v1(4361,3081) ; v1(5509,2897) 5512,2894 5549,2894 5563.65,2879.35 5563.65,2824.21 R26.1 ; Q7.3 5872,3437.35 v1(5872,3323)
  Bottom Layer w10: v1(3884,3093) 3929,3093 3981.58,3145.58 U1.30 ; v1(4361,3081) 4368.5,3088.5 4474.5,3088.5 v1(4482,3096) 4833,3096 5032,2897 v1(5509,2897) 5518,2906 5518,2914 5691,3087 6315,3087 6354,3126 6354,3203 6327,3230 5965,3230 v1(5872,3323)
FluidHeater_OUT: J5.6 Q7.1 | length 7087.1
  Top Layer w10: v1(1782,4112) 1840.72,4170.72 1988.03,4170.72 2039.09,4221.78 2039.09,4331.09 v1(2100,4392) ; Q7.1 5870.73,3707.73 v1(5916,3753)
  Bottom Layer w10: v1(1782,4112) 1782,3939 1797,3924 1797,3796 J5.6 ; v1(2100,4392) 2100,4393 2139,4432 2679,4432 2794,4547 4762,4547 4966,4751 6453,4751 6585,4619 6585,4054 6284,3753 v1(5916,3753)
GND: C1.2 C2.2 C3.2 C4.2 C5.1 C6.2 C7.2 C8.1 C9.1 C10.2 C11.2 C12.2 C13.2 C14.2 C15.2 C16.2 C17.2 C18.2 C19.2 C20.2 C21.2 C22.2 C23.1 C24.1 D4.1 D5.1 D6.1 D7.1 D11.1 D12.1 D13.1 D14.1 J1.14 J2.12 J2.14 J3.1 J4.1 J7.3 LED1.2 Q1.2 Q2.2 Q3.2 Q4.2 Q5.2 Q6.2 Q7.2 R7.1 R11.2 R14.2 R15.2 R18.2 R19.2 R20.2 R26.2 R31.2 R32.2 R39.2 R40.2 R45.1 R46.1 S1.1 U1.9 U1.20 U1.25 U1.41 U1.56 U2.4 U3.2 U4.2 U5.2 | length 24728.8
  Top Layer w10: v1(1335,4049) 1335.26,4049.26 Q2.2 1431.6,4133.16 1449.6,4151.16 1449.6,4155.09 1450.5,4156 R14.2 1454.44,4241.44 1489,4276 ; Q3.2 1350,4313 1387,4276 1489,4276 ; v1(1566,4276) 1489,4276 ; v1(1585,3074) 2150,3074 2228.44,3152.44 ; D4.1 1829,1664 1829,1962 ; C6.2 1916.44,2200 1856,2200 1829,2173 1829,1962 ; v1(2128,4073) 2130,4071 2328,4071 v1(2330,4069) ; C15.2 2228.44,3200 ; v1(2268,3201) 2267,3200 2228.44,3200 ; v1(2412,3201) 2411,3202 2411,3336 2458,3383 v1(2714,3383) ; R7.1 2712,1865 2788,1789 2788,1673 2814.09,1646.91 2834.09,1646.91 C17.2 2835.6,1645.4 2939.54,1645.4 U4.2 3092.8,1644.8 v1(3119,1671) 3119,1753 v1(3250,1884) ; C14.2 3034.09,2548.78 3034.05,2548.83 2895,2548.83 ; v1(3158,2047) 3154.8,2050.2 C7.2 3148,2201.8 3148,2280 3069.22,2358.78 LED1.2 2865,2455 2895,2485 2895,2548.83 ; v1(3264,2753) 3341.33,2753 S1.1 3148.67,2677.33 3121,2705 3060.91,2705 3060,2705.91 R11.2 3011.53,2706.22 2866.81,2561.5 2864.84,2561.5 2860,2556.65 C12.2 2889.14,2554.69 2895,2548.83 ; R45.1 3353,1729 3370,1712 3370,1639.39 ; v1@3334,1604.31 R31.2@3334,1640.3 ; R31.2 R31.2@3334,1640.3 ; C23.1 C23.1@3406,1636.65 ; R39.2 3465,1638.47 3464.09,1637.56 3406.91,1637.56 C23.1@3406,1636.65 ; C8.1 4024.09,2199.69 4024.09,2260.91 v1(4017,2268) 4018,2269 4050,2269 ; v1(4085,2114) 4085,2113 4205,1993 C5.1 ; C13.2 4071,2248 4050,2269 ; v1(4118,3346) 4170.41,3346 4189.41,3327 4231,3327 4248,3344 4248,3391 4237,3402 v1(4237,3504) ; U3.2 4177,2298 4148,2269 4050,2269 ; J7.3 4762,2211 v1(4884,2333) 4891,2340 4891,2373 4946.22,2428.22 C16.2 ; D12.1 4827.12,3767.25 5154.88,3767.25 D13.1 5256.59,3684.13 U5.2@5346.73,3594 ; R19.2 5148,3169 5244,3073 ; v1(5280,2373) 5284,2377 5327,2377 5327.86,2376.14 5336.14,2376.14 5394,2434 C22.2 5459.56,2514.44 ; U5.2 U5.2@5346.73,3594 ; C18.2 5570.44,2442.22 ; C24.1 5591.5,2467.22 5590.6,2466.31 5590.6,2462.38 5570.44,2442.22 ; R20.2 5662,2786 ; D11.1 5826.64,4025.46 5989.31,4025.46 D6.1 ; Q7.2@5878.61,3497.67 5896.23,3497.67 5903.04,3490.86 5903.04,3461.23 5961.22,3403.05 R46.1 5961.22,3233.5 6098,3096.72 R18.2@6098,3095.01 ; C19.2 5973.56,2699.44 ; Q7.2@5977.03,3497.67 5989.95,3510.59 D6.1 ; Q4.2@6365.87,3099.06 6362.74,3095.92 6098.91,3095.92 R18.2@6098,3095.01 ; Q6.2 6694,4062 6579,3947 6343.99,3947 D14.1 D7.1 D6.1 ; 1829,1962 1891,2024 1966,2024 2054,2112 2054,2289.14 2101.08,2336.22 C9.1 2211.78,2336.22 2223,2325 U2.4 2420,2325 2443,2348 2443,2616.14 2428.14,2631 2310,2631 2261.5,2679.5 2261.5,2830 2261.5,2938.5 2228.44,2971.56 2228.44,3152.44 ; 2228.44,3152.44 2228.44,3200 ; R31.2@3334,1640.3 3334.91,1639.39 3370,1639.39 ; 3370,1639.39 3405.09,1639.39 3406,1638.48 C23.1@3406,1636.65 ; 5244,3073 5244,3551 5287,3594 U5.2@5346.73,3594 ; 5244,3073 Q5.2 5311.86,2957.14 5625,2957.14 ; 5459.56,2514.44 5563,2617.88 R26.2 5578,2796 5625,2843 5625,2957.14 ; 5459.56,2514.44 5531.78,2442.22 5570.44,2442.22 ; 5625,2957.14 5630.86,2963 5661.44,2963 R40.2 5662,2786 ; 5662,2786 5756,2880 5907,2880 5973.56,2813.44 5973.56,2699.44 ; 5973.56,2699.44 6031,2756.88 R32.2 6031,2868.38 6031.91,2869.28 6046.42,2869.28 6053,2875.86 6053,3086.92 6058.86,3092.78 R18.2 R18.2@6098,3095.01
  Bottom Layer w10: v1(1335,4049) 1335,3931 1427,3839 1427,3506 1471.93,3461.07 ; R15.2 1424.06,3073.5 1584.5,3073.5 v1(1585,3074) 1429,3230 1429,3418.14 1471.93,3461.07 ; J3.1 1471.93,3461.07 ; J4.1 1981,4421 1890,4421 1827,4358 1827,4283 1820,4276 v1(1566,4276) 1662,4180 1792,4180 1894,4078 2123,4078 v1(2128,4073) ; C21.2@2253.84,4121 C21.2 C21.2@2258.09,4121 ; v1(2268,3201) v1(2412,3201) ; C20.2 2328.78,4194.22 2315,4208 2258,4208 2240,4190 2240,4158 2259,4139 2259,4121.91 C21.2@2258.09,4121 ; v1(2714,3383) 2721.88,3383 2828.12,3276.76 D5.1 3124.88,3276.76 3137.65,3264 3382,3264 ; J2.12 J2.14 2839,4270 2759,4270 2558,4069 v1(2330,4069) 2330,4111 2320,4121 C21.2@2258.09,4121 ; v1(3119,1671) 3252,1671 3334,1589 v1(3348,1589) ; v1(3158,2047) 3250,1955 v1(3250,1884) ; v1(3264,2753) 3264,2952 3298,2986 3398,2986 3455.6,3043.6 C10.2 3455.6,3190.4 3382,3264 ; C11.2@3747.78,3501 3568,3501 3515,3554 3515,3618 3490,3643 3422,3643 3382,3603 3382,3264 ; C11.2 3779.22,3495.78 3787.74,3487.26 U1.41 ; v1(4017,2268) 4085,2200 v1(4085,2114) ; U1.25 4080.35,3259.26 4080.35,3295.35 4094,3309 4119,3309 ; v1(4118,3346) 4119,3345 4119,3309 ; C4.2 4174.72,2886.5 4174.72,2967.5 C3.2 C1.2 C2.2 4175.22,3196.22 4178.43,3199.43 U1.20 4178.09,3259.26 4178.09,3297.91 4167,3309 4119,3309 ; U3.2 4391,2211 J7.3 ; v1(4237,3504) 4237,3496 4265.08,3467.92 4308.01,3467.92 U1.9 ; v1(4884,2333) 4924,2373 v1(5280,2373)
GPIOC13: J2.3 U1.47 | length 951.7
  Bottom Layer w10: J2.3 3340,3850 3417,3773 3660,3773 3827.28,3605.72 3871,3605.72 U1.47
GPIOC14: J2.1 U1.48 | length 840.6
  Bottom Layer w10: J2.1 3440,3855 3503,3792 3665,3792 3831.6,3625.4 3871,3625.4 U1.48
GPIOD0: J2.5 U1.46 | length 1059.8
  Bottom Layer w10: J2.5 3240,3850 3335,3755 3651,3755 3819.97,3586.03 3871,3586.03 U1.46
GPIOD1: J1.13 U1.49 | length 791.4
  Bottom Layer w10: J1.13 3813,4373 3813,4031 3942.21,3901.79 U1.49
GPIOD2: J1.11 U1.50 | length 758.1
  Bottom Layer w10: J1.11 3924,4362 3924,3956 3961.9,3918.1 U1.50
GPIOD3: J1.9 U1.51 | length 750.9
  Bottom Layer w10: J1.9 3970,4411 4013,4368 4013,3941 3981.58,3909.58 U1.51
GPIOD4: J1.7 U1.52 | length 748.8
  Bottom Layer w10: U1.52 4001,3696.19 4001,3904 4029,3932 4029,4368 4070,4409 J1.7
GPIOD5: J1.5 U1.53 | length 781.8
  Bottom Layer w10: U1.53 4020.95,3891.95 4125,3996 4125,4371 J1.5
GPIOD6: J1.3 U1.54 | length 815.1
  Bottom Layer w10: U1.54 4040.64,3881.64 4224,4065 4224,4370 J1.3
GPIOD7: J1.1 U1.55 | length 848.4
  Bottom Layer w10: U1.55 4060.32,3872.32 4321,4133 4321,4367 J1.1
GPIOD8: J2.13 U1.42 | length 1494.8
  Bottom Layer w10: J2.13 2840,3846 3000,3686 3623,3686 3802.06,3506.94 U1.42
GPIOD9: J2.11 U1.43 | length 1387.8
  Bottom Layer w10: J2.11 2940,3844 3081,3703 3630,3703 3806,3527 3828,3527 3871,3526.98 U1.43
GPIOD10: J2.9 U1.44 | length 1277.9
  Bottom Layer w10: J2.9 3040,3847 3168,3719 3638,3719 3810,3547 3825,3547 3825.34,3546.66 3871,3546.66 U1.44
GPIOD11: J2.7 U1.45 | length 1168
  Bottom Layer w10: J2.7 3140,3850 3253,3737 3644,3737 3814.65,3566.35 3871,3566.35 U1.45
GROUND: D1.1 J5.4 J6.4 Q1.1 | length 1787.9
  Top Layer w10: J6.4 1428.05,3586.19 1475.47,3633.61 1753.39,3633.61 J5.4 v1(1794,3437) ; D1.1@1645,2885 D1.1 D1.1@1655.47,2889.06 ; v1@1794,2987 1788,2981 1747.42,2981 D1.1@1655.47,2889.06 ; Q1.1 D1.1@1655.47,2889.06
  Bottom Layer w10: v1(1791,3001) v1@1791,3428
ILUM: J3.4 Q3.3 R15.1 | length 1686
  Top Layer w10: v1(1197,3367) 1197,3704 1278,3785 1278,4454.14 1283.86,4460 1349,4460 Q3.3
  Bottom Layer w10: v1(1197,3367) 1308.72,3367 J3.4 1317,3365.76 1317,3081 1325,3073 R15.1
IMP: C15.1 R12.2 R13.2 U1.11 | length 4446.3
  Top Layer w10: R13.2 2047.28,3277 2052.28,3282 R12.2 2060.16,3282 2061.06,3281.09 2061.06,3273.41 2082.48,3252 2193.14,3252 2199,3257.86 2199,3302.14 2204.86,3308 2250.14,3308 2256,3302.14 C15.1 2256.91,3283.91 2280.84,3283.91 2281.94,3285 2300.14,3285 2306,3279.14 v1(2306,3074) ; v1@2398,3068 2389,3059 2389,2867 2397,2859 v1(2788,2859) ; v1(2944,2858) 2947,2855 3375,2855 3534,2696 4405,2696 v1(4413,2688) ; v1@4566,2697 v1(4568,2699) 4568,2809 4661,2902 v1(4661,3234)
  Bottom Layer w10: v1@2318,3075 2319,3076 v1(2410,3076) ; v1@2787,2860 v1(2788,2859) 2789,2858 v1(2944,2858) ; U1.11 4364.2,3428.2 4372,3436 4372,3450 4389,3467 4480,3467 4511,3436 4511,3359 4490,3338 4490,3284 4540,3234 v1(4661,3234) ; v1(4413,2688) 4428,2688 4439,2699 v1(4568,2699)
IMP_IN: J3.3 R13.1 | length 316.5
  Top Layer w10: v1(1634,3276) 1761,3276 1762,3277 R13.1
  Bottom Layer w10: J3.3 1544.56,3276 v1(1634,3276)
IsFHerror: C22.1 R30.2 R38.2 U1.32 | length 2774.2
  Top Layer w10: v1(3776,3199) 3776,3039 v1(3839,2976) ; v1(5249,2587) 5207.56,2545.56 R30.2 5281,2501 5325,2545 5393.09,2545 5394,2544.09 C22.1
  Bottom Layer w10: v1(3776,3199) 3931,3199 3941.87,3209.87 3941.87,3258.57 U1.32 ; v1(3839,2976) 3842,2979 3913,2979 3920,2972 R38.2 3919.22,2931 3890,2931 3867,2908 3867,2703 4087,2483 4927,2483 4991,2419 5057,2419 5113,2475 5113,2531 5169,2587 v1(5249,2587)
IsFHerror_IN: J5.5 R38.1 | length 8253.7
  Top Layer w10: J5.5 1750,3737 1433.86,3737 1428,3731.14 1428,3646 1420.77,3638.77 1256.86,3638.77 1251,3632.91 1251,1830.63 1628.31,1453.31 2775.31,1453.31 2884.63,1344 3594.37,1344 3680.37,1430 4531,1430 4542,1441 4542,2622.09 4626,2706.09 v1(4626,2764) ; v1@3916,2717 4354,2717 v1@4410.5,2773.5
  Bottom Layer w10: v1(3919,2733) 3920,2734 R38.1 ; v1(4411,2769) 4621,2769 v1(4626,2764)
IsHeating: C16.1 R24.2 R25.2 U1.31 | length 2259.6
  Top Layer w10: v1(3824,3161) 3818,3155 3818,3064.82 3840,3042.82 v1(3840,3032) ; R24.2 5010,2306.72 4973.78,2342.94 C16.1 4974.28,2472.5 5044.5,2472.5 v1(5045,2473)
  Bottom Layer w10: v1(3824,3161) 3921,3161 3961.9,3201.9 U1.31 ; v1(3840,3032) 3903,3032 3958,2977 R25.2 3958.78,2931 3981,2931 4013,2899 4013,2753 4000,2740 4000,2609 4104,2505 5013,2505 v1(5045,2473)
IsHeating_IN: J6.5 R25.1 | length 7769.4
  Top Layer w10: J6.5 1238.86,3686.19 1233,3680.33 1233,1826 1629,1430 2776,1430 2891,1315 3588,1315 3687,1414 4542.37,1414 4560.88,1432.51 4560.88,2618.35 4679,2736.46 v1(4679,2846) ; v1(3977,2845) v1(4409,2845)
  Bottom Layer w10: R25.1 3958,2862 v1@3969,2851 ; v1(4409,2845) 4678,2845 v1(4679,2846) v1@4680,2847
LightD: Q4.3 R18.1 U1.24 | length 3300.1
  Top Layer w10: v1(4221,2759) 4221.5,2759.5 4337.5,2759.5 v1(4338,2760) ; v1(6098,2791) R18.1@6098,3061.28 ; R18.1 R18.1@6098,3061.28 ; Q4.3 6123.22,3040 6102.84,3060.38 6098.91,3060.38 R18.1@6098,3061.28
  Bottom Layer w10: U1.24 4099.69,3162.69 4088,3151 4088,3042 4053,3007 4053,2784 4132,2705 4167,2705 v1(4221,2759) ; v1(4338,2760) 4338,2683 4387,2634 4582,2634 4739,2791 v1(6098,2791)
LightD_OUT: D8.1 J4.6 Q4.1 | length 5727.8
  Top Layer w10: v1(2050,4170) 2053,4167 v1(2283,4167) ; v1(6288.11,3188) 6318,3158.11 Q4.1
  Bottom Layer w10: J4.6 1775,4228 1832.07,4170.93 1835,4168 1981.48,4168 cw(c1988,4128) 1994.52,4168 2048,4168 v1(2050,4170) ; v1(2283,4167) 2507.91,4167 2669.18,4328.27 2669.18,4333.09 2824.07,4487.98 4779.68,4487.98 4979,4288.66 D8.1 5492.13,3188 v1(6288.11,3188)
LightN: Q5.3 R19.1 U1.27 | length 2943.6
  Top Layer w10: v1(4048,3404) 4048,3618 4132,3702 4132,4215.14 4137.86,4221 4318.14,4221 4324,4215.14 4324,4096 4379,4041 4476,4041 4491.86,4056.86 4500.14,4056.86 4642,3915 4642,3383 4851.16,3173.84 4851.16,3169.91 4852.06,3169 R19.1 4859.94,3169 4859.94,3154.06 4877,3137 5078,3137 5144,3071 Q5.3
  Bottom Layer w10: U1.27 4040.29,3259.26 4040.29,3308.33 4032,3316.62 4032,3355.7 4047,3370.7 4047,3403 v1(4048,3404)
LightN_OUT: D9.1 J4.7 Q5.1 | length 6531.5
  Top Layer w10: J4.7 1647,4369 1647,4456 1663,4472 1707,4472 1797,4562 5887.14,4562 5893,4567.86 D9.1 ; v1(5532,3113) 5584,3165 5584,3705 5714,3835 v1(5866,3835)
  Bottom Layer w10: Q5.1 5444,3025 v1(5532,3113) ; v1(5866,3835) 5866,3845 5893,3872 D9.1
LightR: R20.1 U1.28 | length 2451.9
  Top Layer w10: v1(5658,2598) 5661,2601 5661,2610 5662,2611 R20.1
  Bottom Layer w10: U1.28 4020.95,3050.05 4037,3034 4037,2762 4126,2673 4126,2574 4147,2553 4563,2553 4659,2649 5327,2649 5378,2598 v1(5658,2598)
LightR_OUT: D10.1 J4.8 Q6.1 | length 5378.2
  Top Layer w10: J4.8 1804,4544 6446.86,4544 ; D10.1 6446.86,4436.65 6446.86,4544 ; Q6.1 6714,4546.14 6708.14,4552 6454.86,4552 6446.86,4544
MCLR: J7.1 R2.1 U1.7 | length 3446.7
  Top Layer w10: R2.1 v1@4453,1617 ; v1(4430,2966) 4533,3069 v1(4533,3305) ; J7.1 4603,2011 4588,2026 4588,2226 4623.5,2261.5 4738.5,2261.5 4894,2417 v1(4894,2864)
  Bottom Layer w10: U1.7 4481.94,3506.94 4497,3522 4497,3593 4526,3622 4566,3622 4576,3612 4577.14,3612 4583,3606.14 4583,3459 4533,3409 v1(4533,3305) ; v1(4430,2966) 4770,2966 4790,2986 4832,2986 4894,2924 v1(4894,2864) ; v1(4442,1620) 4635.14,1620 4641,1625.86 4641,2009 J7.1
NetC8_2: C8.2 D3.1 R5.1 S1.2 U3.3 | length 1415
  Top Layer w10: S1.2 3612.67,2218.67 3722,2328 D3.1 3762,2328 3918.78,2171.22 C8.2 4087.72,2171.22 ; R5.1 4116.28,2199.78 4087.72,2171.22 ; U3.3 4277,2129 4243,2095 4163.94,2095 4087.72,2171.22
NetC9_2: C9.2 U2.3 | length 192.5
  Top Layer w10: C9.2 2160,2367.72 2167.28,2375 U2.3
NetC10_1: C10.1 U1.39 Y1.2 | length 747.7
  Bottom Layer w10: C10.1 3483.16,3199.01 3458,3224.17 Y1.2 3611,3366 3673,3428 3743,3428 3762.89,3447.89 U1.39
NetC11_1: C11.1 U1.40 Y1.1 | length 454.1
  Bottom Layer w10: Y1.1 3555.78,3468.22 C11.1 3753.32,3467.9 3871.02,3467.9 U1.40
NetC23_2: C23.2 R33.2 R41.2 R43.2 | length 312.8
  Top Layer w10: R43.2 3282,1589.28 3319.28,1552 3348.41,1552 3354.06,1546.34 3358,1546.34 3358.91,1545.44 R33.2 3405,1541.5 ; C23.2 3406,1542.5 3405,1541.5 ; R41.2 3472.28,1482 3412.78,1541.5 3405,1541.5
NetC24_2: C24.2 R34.2 R42.2 R44.2 | length 578.2
  Top Layer w10: C24.2 5623,2416.22 5695.56,2343.66 R42.2 5756,2342.73 5756.91,2341.82 5821.07,2341.82 5959.84,2480.6 5962.09,2480.6 5963,2481.5 R44.2 ; R34.2 5870.68,2489.12 R44.2@5963.76,2489.12
NetD4_2: D4.2 L1.1 U2.2 | length 764.7
  Top Layer w10: D4.2 1870.31,2405.31 2049.09,2405.31 L1.1 2102.35,2406.22 2108.57,2400 2164.85,2400 2189.85,2425 U2.2
NetD8_2: D8.2 R21.2 | length 220
  Bottom Layer w10: D8.2 4983.62,4447.49 R21.2
NetD9_2: D9.2 R22.2 | length 305.4
  Bottom Layer w10: R22.2 5211.32,4665 5212.22,4664.09 5212.22,4656.41 5226.64,4642 5449,4642 5454.37,4647.37 5484.37,4647.37 D9.2
NetD10_2: D10.2 R23.2 | length 1912.1
  Bottom Layer w10: R23.2 5359.5,4664 5410.5,4715 6427,4715 6544,4598 6544,4057 6519,4032 6443.79,4032 D10.2
NetLED1_1: LED1.1 R4.2 | length 193.1
  Top Layer w10: R4.2 2865,2144.57 LED1.1
NetLED2_2: LED2.2 R10.1 | length 42.9
  Bottom Layer w10: LED2.2 3679,3324.81 3679.91,3325.72 3719.09,3325.72 3720,3326.63 R10.1
NetLED3_2: LED3.2 R11.1 | length 236.2
  Top Layer w10: LED3.2 2938.56,2748.78 2953.56,2733.78 R11.1
NetLED4_2: LED4.2 R16.1 | length 149.2
  Top Layer w10: R16.1 LED4.2
NetLED5_2: LED5.2 R17.1 | length 126.9
  Top Layer w10: LED5.2 5614.9,4220.31 5614.9,4098.91 5615.81,4098 R17.1
NetQ1_3: Q1.3 R3.2 | length 243.3
  Top Layer w10: R3.2 1920.55,2770.94 Q1.3
NetQ3_1: Q3.1 R21.1 R22.1 R23.1 | length 4046.9
  Top Layer w10: Q3.1 1625.14,4423.6 1631,4429.46 1631,4462.63 1656.37,4488 1690,4488 1782,4580 4887,4580 v1(4916,4609)
  Bottom Layer w10: v1(4916,4609) 4923.65,4616.65 4923.65,4632.53 4952.12,4661 R21.1 4960,4661 4960.9,4661.91 4960.9,4669.59 4978.32,4687 5229.14,4687 5235,4681.14 5235,4665.06 R22.1 5238.88,4665 5239.88,4664 R23.1
NetR6_2: R6.2 R7.2 U2.5 | length 919.1
  Top Layer w10: R6.2 2524,1900 2543.78,1880.22 ; U2.5 2537.49,2325 2543.78,2318.71 2543.78,1880.22 ; R7.2 2543.78,1865.66 2543.78,1880.22
NetR8_1: R8.1 U2.1 U2.7 U2.8 | length 806.4
  Top Layer w10: R8.1 2286.02,2502.99 2314.02,2475 U2.1 2348.12,2477.61 2398.14,2477.61 2404,2483.46 2404,2539 v1(2399,2544) ; v1(2493,2543) 2500.65,2535.35 2528.65,2535.35 2539,2525 2539,2479.51 U2.8 U2.7
  Bottom Layer w10: v1(2399,2544) 2492,2544 v1(2493,2543)
NetR9_2: R9.2 U1.8 | length 213.9